# Altium PCB 8810.PcbDoc (part 1 of 2)
Units mm, origin at the board's own origin, x right, y up, seen from the top; angles counter-clockwise.
Board outline 295 x 220 mm, 2 copper layers (Top Layer, Bottom Layer); 156 components, 133 nets, 555 pads, 13 vias.
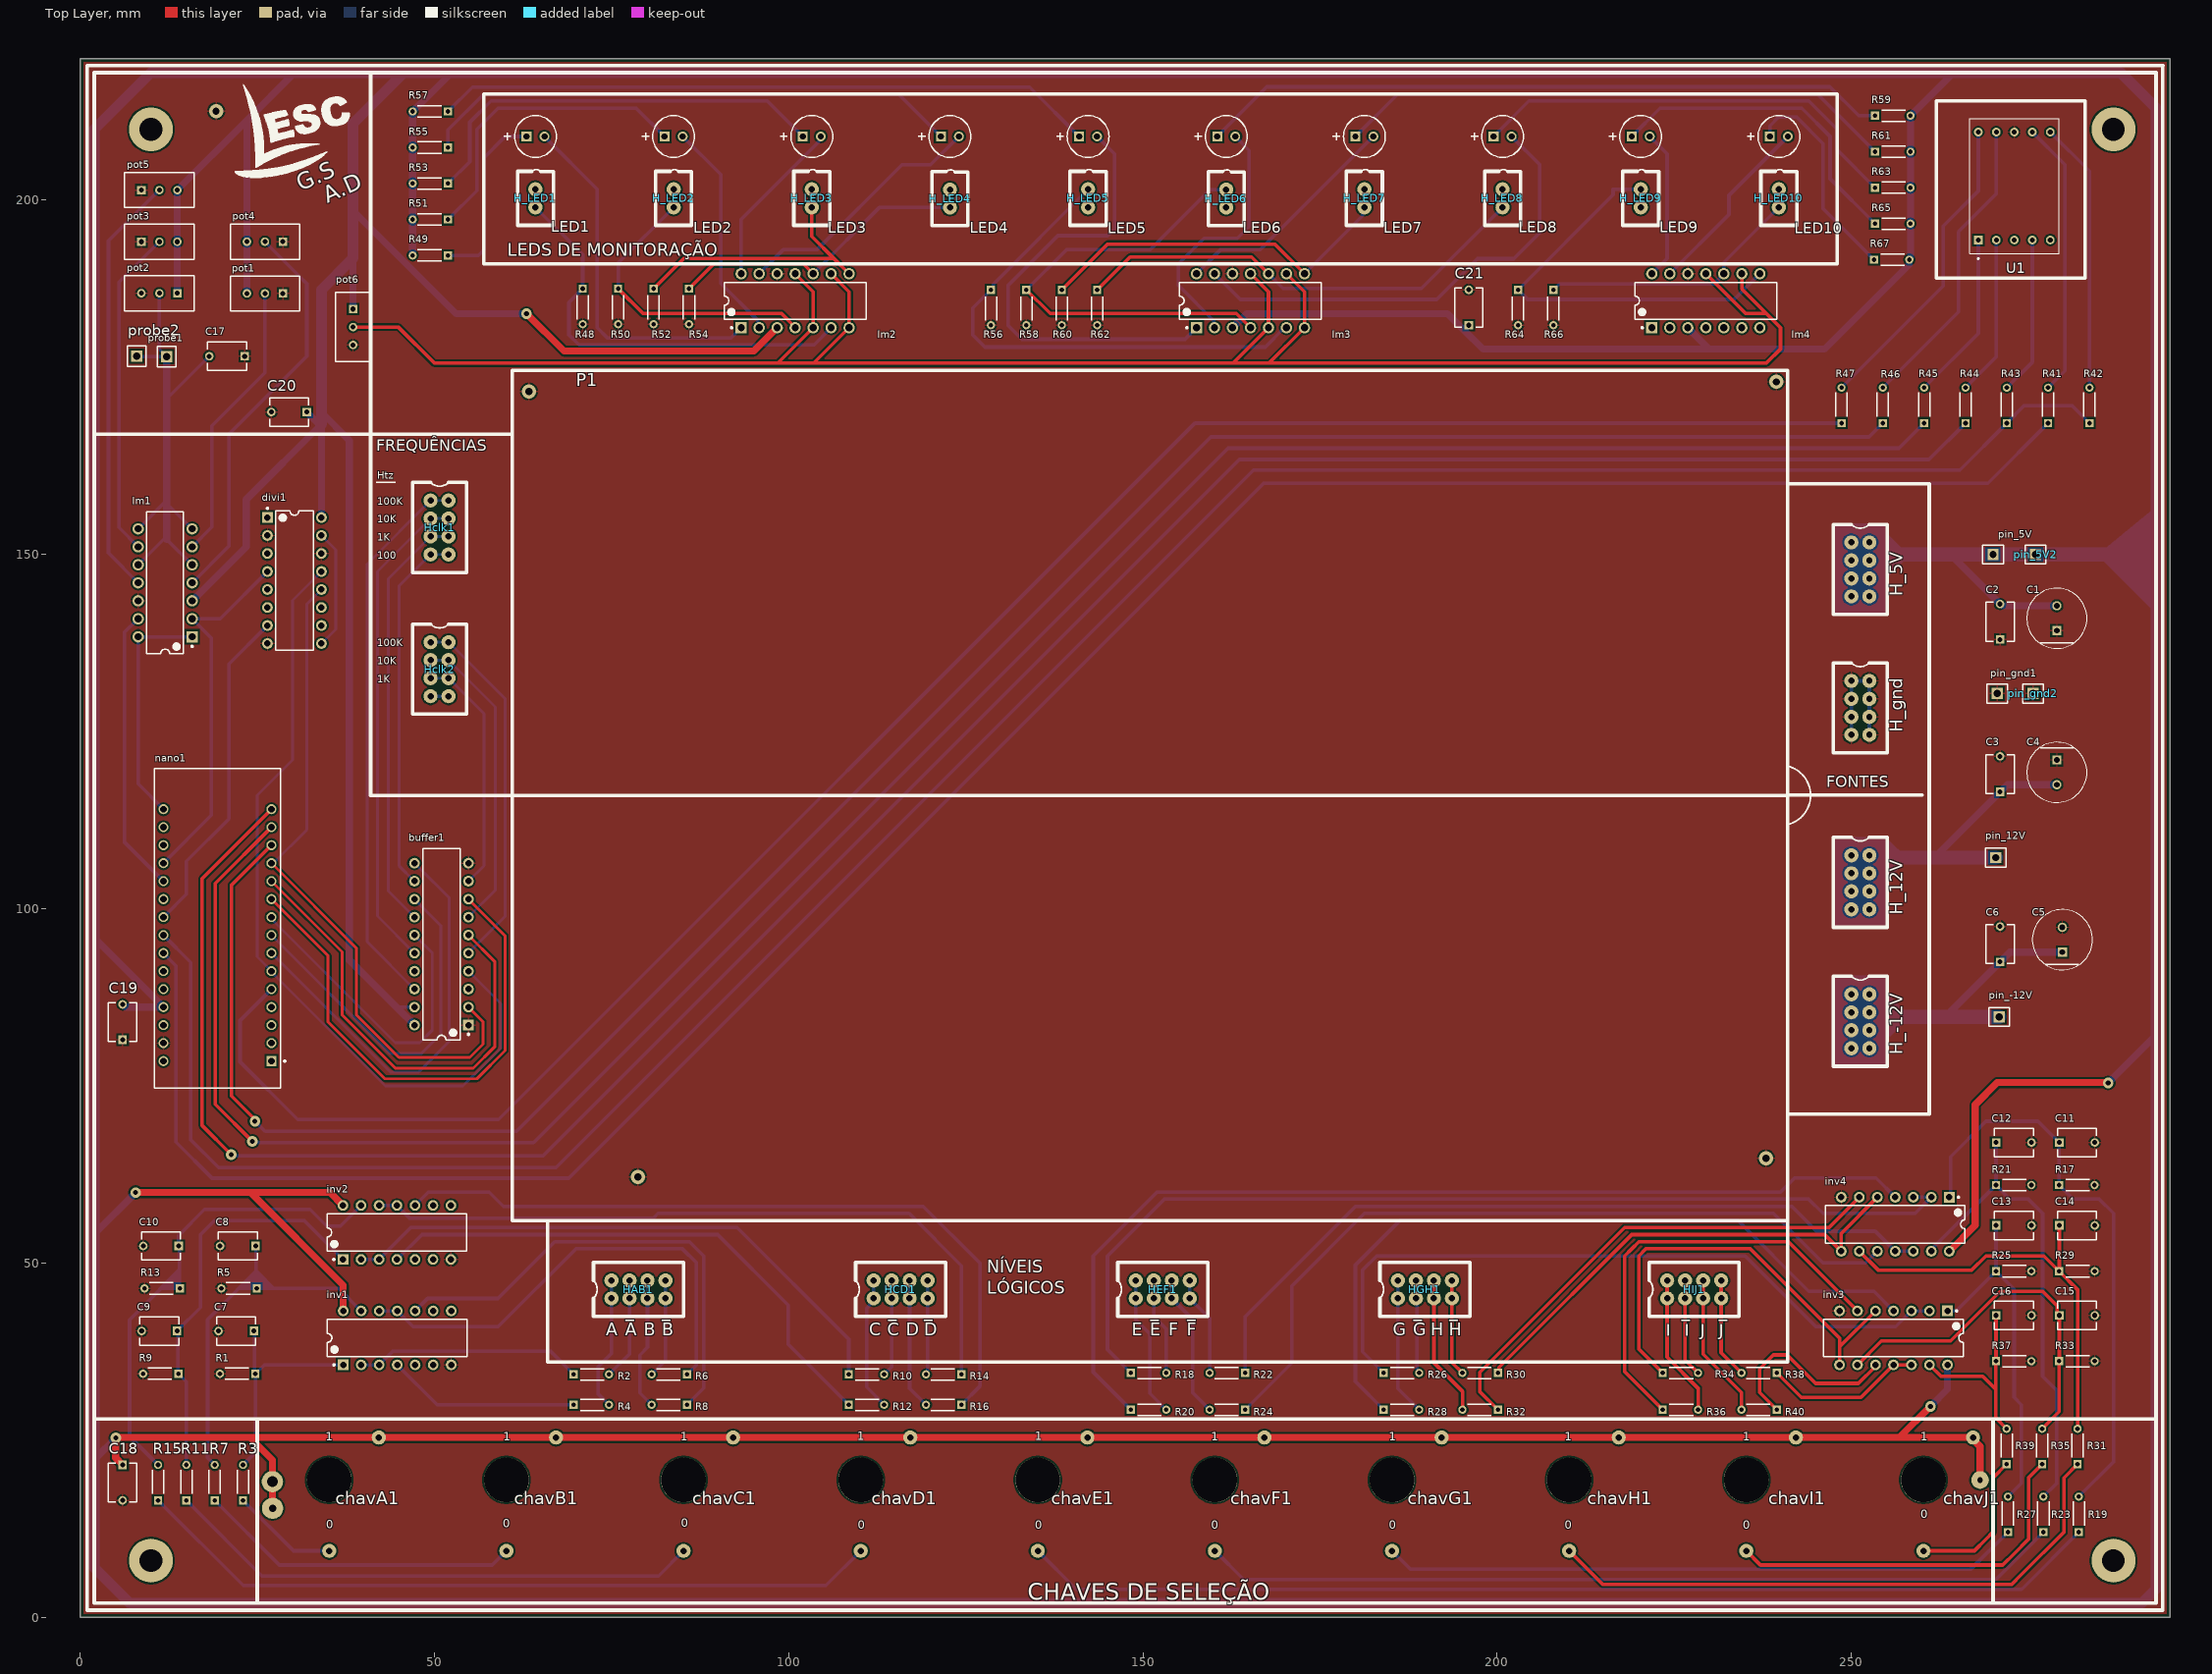
[diagram p0: Top Layer view]
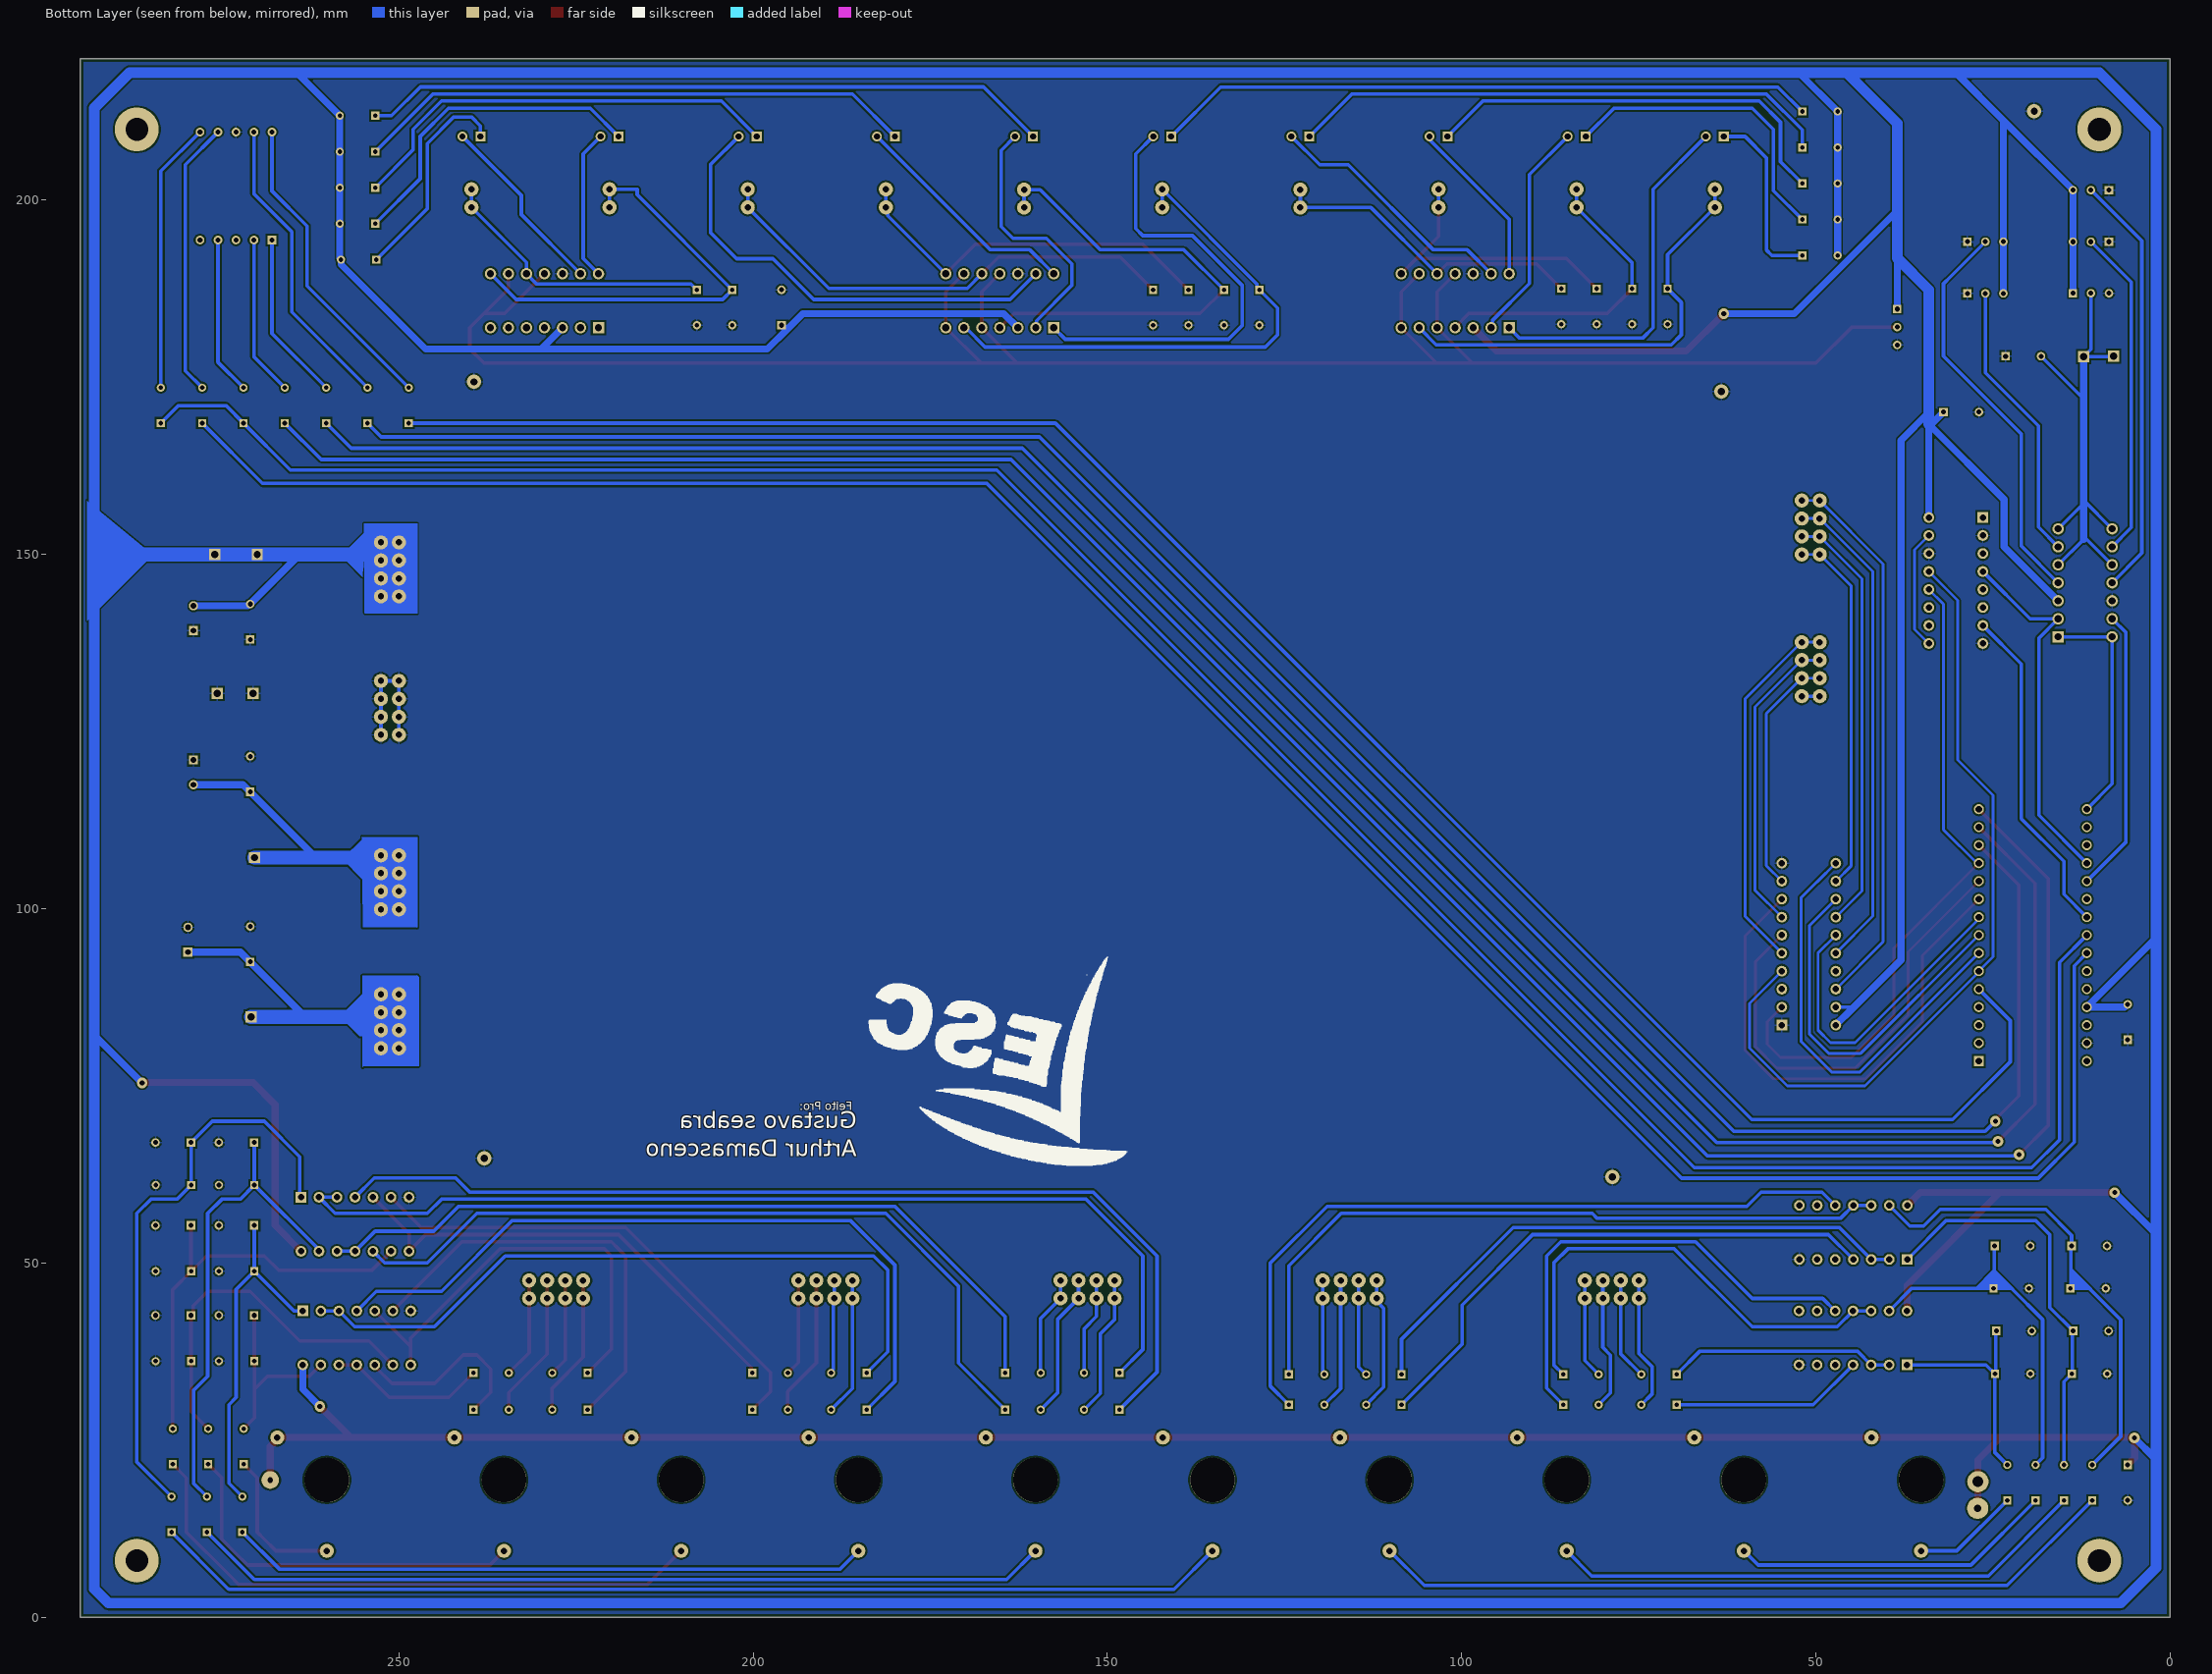
[diagram p1: Bottom Layer view, seen from below]

## Layer stack, top to bottom
Top Solder: solder mask 0.0102, Solder Resist, Dk 3.5
Top Layer: signal copper 0.0356
Dielectric 1: dielectric 0.32, FR-4, Dk 4.8
Bottom Layer: signal copper 0.0356
Bottom Solder: solder mask 0.0102, Solder Resist, Dk 3.5

## Board outline
0,0 295,0 295,220 0,220

## Design rules (kind name [scope] priority, off if disabled: settings)
BoardOutlineClearance [All] p1: gap=0.5 ignorepadtopadclearanceinfootprint=FALSE
Clearance [All] p1: gap=0.254 ignorepadtopadclearanceinfootprint=FALSE
PolygonConnect [All] p1: connectstyle=Relief reliefconductorwidth=0.254 reliefentries=4 polygonreliefangle="90 Angle" airgapwidth=0.254
RoutingVias [All] p1: holewidth=0.711 width=1.5 viastyle="Through Hole" minholewidth=0.15 minwidth=0.35 maxholewidth=6 maxwidth=8
SolderMaskExpansion [All] p1: expansion=0.102 istentingtop=FALSE
Width [All] p1: maxlimit=2 minlimit=0.2 preferedwidth=0.5
30 further rules are at their usual default settings.

## Classes and differential pairs
component class probe: C17 divi1 lm1 "PONTA DE PROVA" pot1 pot2 pot3 pot4 pot5 probe1 probe2 R41 R42 R43 R44 R45 R46 R47 U1
component class alimentacao: C1 C2 C3 C4 C5 C6 H_5V H_12V H_-12V H_-12v H_gnd pin_5V pin_5V2 pin_12V pin_-12V pin_gnd1 pin_gnd2
component class clock: buffer1 C19 C20 Hclk1 Hclk2 nano1
component class leds: C21 H_LED1 H_LED2 H_LED3 H_LED4 H_LED5 H_LED6 H_LED7 H_LED8 H_LED9 H_LED10 LED1 LED2 LED3 LED4 LED5 LED6 LED7 LED8 LED9 LED10 lm2 lm3 lm4 pot6 R48 R49 R50 R51 R52 R53 R54 R55 R56 R57 R58 R59 R60 R61 R62 R63 R64 R65 R66 R67
component class protoboard: P1
component class chaves: C7 C8 C9 C10 C11 C12 C13 C14 C15 C16 C18 chavA1 chavB1 chavC1 chavD1 chavE1 chavF1 chavG1 chavH1 chavI1 chavJ1 HAB1 HCD1 HEF1 HGH1 HIJ1 inv1 inv2 inv3 inv4 j R1 R2 R3 R4 R5 R6 R7 R8 R9 R10 R11 R12 R13 R14 R15 R16 R17 R18 R19 R20 R21 R22 R23 R24 R25 R26 R27 R28 R29 R30 R31 R32 R33 R34 R35 R36 R37 R38 R39 R40

## Components (designator, comment, footprint, x,y, rotation, side; value= is the part's Value field where it differs from the comment)
buffer1 "SN74LS241N" N0020A 51,95 r180 top locked
C1 "EEU-FM1H101BJ" FP-FM8-MFG 279,141 r90 top locked
C2 "RCER71H335K3K1H03B" FP-RCE3M1-MFG 271,140.5 r90 top locked
C3 "RCER71H335K3K1H03B" FP-RCE3M1-MFG 271,119 r90 top locked
C4 "EEU-FM1H101BJ" FP-FM8-MFG 279,119.25 r270 top locked
C5 "EEU-FM1H101BJ" FP-FM8-MFG 279.78,95.632 r90 top locked
C6 "RCER71H335K3K1H03B" FP-RCE3M1-MFG 271,95 r90 top locked
C7 "RCER71H335K3K1H03B" FP-RCE3M1-MFG 22.031,40.409 r180 top locked
C8 "RCER71H335K3K1H03B" FP-RCE3M1-MFG 22.263,52.4 r180 top locked
C9 "RCER71H335K3K1H03B" FP-RCE3M1-MFG 11.185,40.409 r180 top locked
C10 "RCER71H335K3K1H03B" FP-RCE3M1-MFG 11.417,52.4 r180 top locked
C11 "RCER71H335K3K1H03B" FP-RCE3M1-MFG 281.854,67 r0 top locked
C12 "RCER71H335K3K1H03B" FP-RCE3M1-MFG 272.934,67 r0 top locked
C13 "RCER71H335K3K1H03B" FP-RCE3M1-MFG 272.934,55.307 r0 top locked
C14 "RCER71H335K3K1H03B" FP-RCE3M1-MFG 281.854,55.307 r0 top locked
C15 "RCER71H335K3K1H03B" FP-RCE3M1-MFG 281.862,42.603 r0 top locked
C16 "RCER71H335K3K1H03B" FP-RCE3M1-MFG 272.934,42.603 r0 top locked
C17 "RCER71H335K3K1H03B" FP-RCE3M1-MFG 20.73,177.98 r180 top locked
C18 "RCER71H335K3K1H03B" FP-RCE3M1-MFG 6,19 r270 top
C19 "RCER71H335K3K1H03B" FP-RCE3M1-MFG 6,84 r90 top
C20 "RCER71H335K3K1H03B" FP-RCE3M1-MFG 29.493,170.096 r180 top
C21 "RCER71H335K3K1H03B" FP-RCE3M1-MFG 196,184.857 r90 top
chavA1 "chave MTS-102" MTS-102 35.168,19.372 r270 top
chavB1 "chave MTS-102" MTS-102 60.168,19.372 r270 top
chavC1 "chave MTS-102" MTS-102 85.168,19.372 r270 top
chavD1 "chave MTS-102" MTS-102 110.168,19.372 r270 top
chavE1 "chave MTS-102" MTS-102 135.168,19.372 r270 top
chavF1 "chave MTS-102" MTS-102 160.168,19.372 r270 top
chavG1 "chave MTS-102" MTS-102 185.168,19.372 r270 top
chavH1 "chave MTS-102" MTS-102 210.168,19.372 r270 top
chavI1 "chave MTS-102" MTS-102 235.168,19.372 r270 top
chavJ1 "chave MTS-102" MTS-102 260.168,19.372 r270 top
divi1 "CD74HC390E" N0016A 30.253,146.325 r0 top locked
H_5V "header 2x4" "header 2x4" 250,151.7 r0 top locked
H_12V "header 2x4" "header 2x4" 250,107.54 r0 top locked
H_-12V "header 2x4" "header 2x4" 250,87.92 r0 top locked
H_gnd "header 2x4" "header 2x4" 250,132.16 r0 top locked
H_LED1 "header 2x1" "header 2x1" 64.27,201.54 r0 top locked
H_LED2 "header 2x1" "header 2x1" 83.77,201.54 r0 top locked
H_LED3 "header 2x1" "header 2x1" 103.27,201.54 r0 top locked
H_LED4 "header 2x1" "header 2x1" 122.77,201.5 r0 top locked
H_LED5 "header 2x1" "header 2x1" 142.27,201.54 r0 top locked
H_LED6 "header 2x1" "header 2x1" 161.77,201.5 r0 top locked
H_LED7 "header 2x1" "header 2x1" 181.27,201.54 r0 top locked
H_LED8 "header 2x1" "header 2x1" 200.77,201.54 r0 top locked
H_LED9 "header 2x1" "header 2x1" 220.27,201.54 r0 top locked
H_LED10 "header 2x1" "header 2x1" 239.77,201.54 r0 top locked
HAB1 "header 2x4" "header 2x4" 75,45 r90 top locked
HCD1 "header 2x4" "header 2x4" 112,45 r90 top locked
Hclk1 "header 2x4" "header 2x4" 49.46,157.62 r0 top
Hclk2 "header 2x4" "header 2x4" 49.46,137.62 r0 top locked
HEF1 "header 2x4" "header 2x4" 149,45 r90 top locked
HGH1 "header 2x4" "header 2x4" 186,45 r90 top locked
HIJ1 "header 2x4" "header 2x4" 224,45 r90 top locked
inv1 "SN74HC14N" N0014A 44.752,39.43 r90 top locked
inv2 "SN74HC14N" N0014A 44.726,54.311 r90 top locked
inv3 "SN74HC14N" N0014A 255.944,39.43 r270 top locked
inv4 "SN74HC14N" N0014A 256.2,55.464 r270 top locked
LED1 "WP7113SGD" KING-WP7113SGD_V 64.27,209 r0 top locked
LED2 "WP7113SGD" KING-WP7113SGD_V 83.77,209 r0 top locked
LED3 "WP7113SGD" KING-WP7113SGD_V 103.27,209 r0 top locked
LED4 "WP7113SGD" KING-WP7113SGD_V 122.77,209 r0 top locked
LED5 "WP7113SGD" KING-WP7113SGD_V 142.27,209 r0 top locked
LED6 "WP7113SGD" KING-WP7113SGD_V 161.77,209 r0 top locked
LED7 "WP7113SGD" KING-WP7113SGD_V 181.27,209 r0 top locked
LED8 "WP7113SGD" KING-WP7113SGD_V 200.77,209 r0 top locked
LED9 "WP7113SGD" KING-WP7113SGD_V 220.27,209 r0 top locked
LED10 "WP7113SGD" KING-WP7113SGD_V 239.77,209 r0 top locked
lm1 "LM339J" J0014A 12,146 r180 top locked
lm2 "LM339J" J0014A 100.92,185.81 r90 top locked
lm3 "LM339J" J0014A 165.19,185.81 r90 top locked
lm4 "LM339J" J0014A 229.46,185.81 r90 top locked
nano1 "A000005" FP-A000005-MFG 19.385,97.223 r180 top locked
P1 "2 protoboard 830 pin" PCBComponent_1 241,56 r180 top locked
pin_5V "TSW-101-07-L-S" FP-TSW-101-07-L-S-MFG 270,150 r180 top locked
pin_5V2 "TSW-101-07-L-S" FP-TSW-101-07-L-S-MFG 276,150 r180 top locked
pin_12V "TSW-101-07-L-S" FP-TSW-101-07-L-S-MFG 270.365,107.213 r180 top locked
pin_-12V "TSW-101-07-L-S" FP-TSW-101-07-L-S-MFG 270.881,84.731 r180 top locked
pin_gnd1 "TSW-101-07-L-S" FP-TSW-101-07-L-S-MFG 270.587,130.368 r180 top locked
pin_gnd2 "TSW-101-07-L-S" FP-TSW-101-07-L-S-MFG 275.667,130.368 r180 top locked
pot1 "3296W-1-501LF" FP-3296W-MFG 26.085,186.839 r90 top locked
pot2 "3296W-1-501LF" FP-3296W-MFG 11.18,186.859 r90 top locked
pot3 "3296W-1-501LF" FP-3296W-MFG 11.18,194.143 r270 top locked
pot4 "3296W-1-501LF" FP-3296W-MFG 26.085,194.134 r90 top locked
pot5 "3296W-1-501LF" FP-3296W-MFG 11.18,201.438 r270 top locked
pot6 "3296W-1-501LF" FP-3296W-MFG 38.527,182.102 r180 top locked
probe1 "TSW-101-07-L-S" FP-TSW-101-07-L-S-MFG 12.228,177.926 r90 top locked
probe2 "TSW-101-07-L-S" FP-TSW-101-07-L-S-MFG 8,178 r90 top
R1 "MRS16000C2002FCT00" FP-MRS1600-MFG 22.234,34.362 r180 top locked
R2 "MRS16000C2002FCT00" FP-MRS1600-MFG 72.152,34.279 r0 top locked
R3 "MRS16000C2002FCT00" FP-MRS1600-MFG 23,19 r90 top
R4 "MRS16000C2002FCT00" FP-MRS1600-MFG 72.152,29.988 r0 top locked
R5 "MRS16000C2002FCT00" FP-MRS1600-MFG 22.431,46.414 r180 top locked
R6 "MRS16000C2002FCT00" FP-MRS1600-MFG 83.161,34.279 r180 top locked
R7 "MRS16000C2002FCT00" FP-MRS1600-MFG 19,19 r90 top
R8 "MRS16000C2002FCT00" FP-MRS1600-MFG 83.161,29.988 r180 top locked
R9 "MRS16000C2002FCT00" FP-MRS1600-MFG 11.388,34.362 r180 top locked
R10 "MRS16000C2002FCT00" FP-MRS1600-MFG 110.985,34.279 r0 top locked
R11 "MRS16000C2002FCT00" FP-MRS1600-MFG 15,19 r90 top
R12 "MRS16000C2002FCT00" FP-MRS1600-MFG 110.985,29.988 r0 top locked
R13 "MRS16000C2002FCT00" FP-MRS1600-MFG 11.586,46.414 r180 top locked
R14 "MRS16000C2002FCT00" FP-MRS1600-MFG 121.885,34.279 r180 top locked
R15 "MRS16000C2002FCT00" FP-MRS1600-MFG 11,19 r90 top
R16 "MRS16000C2002FCT00" FP-MRS1600-MFG 121.885,29.988 r180 top locked
R17 "MRS16000C2002FCT00" FP-MRS1600-MFG 281.829,61 r0 top locked
R18 "MRS16000C2002FCT00" FP-MRS1600-MFG 150.806,34.478 r0 top locked
R19 "MRS16000C2002FCT00" FP-MRS1600-MFG 282.104,14.518 r90 top locked
R20 "MRS16000C2002FCT00" FP-MRS1600-MFG 150.806,29.29 r0 top locked
R21 "MRS16000C2002FCT00" FP-MRS1600-MFG 272.909,61 r0 top locked
R22 "MRS16000C2002FCT00" FP-MRS1600-MFG 161.925,34.478 r180 top locked
R23 "MRS16000C2002FCT00" FP-MRS1600-MFG 277.1,14.518 r90 top locked
R24 "MRS16000C2002FCT00" FP-MRS1600-MFG 161.925,29.29 r180 top locked
R25 "MRS16000C2002FCT00" FP-MRS1600-MFG 272.909,48.841 r0 top locked
R26 "MRS16000C2002FCT00" FP-MRS1600-MFG 186.494,34.478 r0 top locked
R27 "MRS16000C2002FCT00" FP-MRS1600-MFG 272.095,14.518 r90 top locked
R28 "MRS16000C2002FCT00" FP-MRS1600-MFG 186.494,29.29 r0 top locked
R29 "MRS16000C2002FCT00" FP-MRS1600-MFG 281.837,48.841 r0 top locked
R30 "MRS16000C2002FCT00" FP-MRS1600-MFG 197.613,34.478 r180 top locked
R31 "MRS16000C2002FCT00" FP-MRS1600-MFG 281.928,24.1 r90 top locked
R32 "MRS16000C2002FCT00" FP-MRS1600-MFG 197.613,29.29 r180 top locked
R33 "MRS16000C2002FCT00" FP-MRS1600-MFG 281.837,36.138 r0 top locked
R34 "MRS16000C2002FCT00" FP-MRS1600-MFG 225.872,34.478 r0 top locked
R35 "MRS16000C2002FCT00" FP-MRS1600-MFG 276.924,24.1 r90 top locked
R36 "MRS16000C2002FCT00" FP-MRS1600-MFG 225.872,29.29 r0 top locked
R37 "MRS16000C2002FCT00" FP-MRS1600-MFG 272.909,36.138 r0 top locked
R38 "MRS16000C2002FCT00" FP-MRS1600-MFG 236.991,34.478 r180 top locked
R39 "MRS16000C2002FCT00" FP-MRS1600-MFG 271.919,24.1 r90 top locked
R40 "MRS16000C2002FCT00" FP-MRS1600-MFG 236.991,29.29 r180 top locked
R41 "MRS16000C2002FCT00" FP-MRS1600-MFG 277.774,171.038 r90 top locked
R42 "MRS16000C2002FCT00" FP-MRS1600-MFG 283.608,171.038 r90 top locked
R43 "MRS16000C2002FCT00" FP-MRS1600-MFG 271.941,171.038 r90 top locked
R44 "MRS16000C2002FCT00" FP-MRS1600-MFG 266.107,171.038 r90 top locked
R45 "MRS16000C2002FCT00" FP-MRS1600-MFG 260.274,171.038 r90 top locked
R46 "MRS16000C2002FCT00" FP-MRS1600-MFG 254.441,171.038 r90 top locked
R47 "MRS16000C2002FCT00" FP-MRS1600-MFG 248.607,171.038 r90 top locked
R48 "MRS16000C2002FCT00" FP-MRS1600-MFG 70.939,185.009 r270 top locked
R49 "MRS16000C2002FCT00" FP-MRS1600-MFG 49.438,192.206 r180 top locked
R50 "MRS16000C2002FCT00" FP-MRS1600-MFG 75.939,185.009 r270 top locked
R51 "MRS16000C2002FCT00" FP-MRS1600-MFG 49.438,197.284 r180 top locked
R52 "MRS16000C2002FCT00" FP-MRS1600-MFG 80.939,185.009 r270 top locked
R53 "MRS16000C2002FCT00" FP-MRS1600-MFG 49.438,202.362 r180 top locked
R54 "MRS16000C2002FCT00" FP-MRS1600-MFG 85.939,185.009 r270 top locked
R55 "MRS16000C2002FCT00" FP-MRS1600-MFG 49.438,207.44 r180 top locked
R56 "MRS16000C2002FCT00" FP-MRS1600-MFG 128.559,184.857 r270 top locked
R57 "MRS16000C2002FCT00" FP-MRS1600-MFG 49.438,212.518 r180 top locked
R58 "MRS16000C2002FCT00" FP-MRS1600-MFG 133.559,184.857 r270 top locked
R59 "MRS16000C2002FCT00" FP-MRS1600-MFG 255.847,211.927 r0 top locked
R60 "MRS16000C2002FCT00" FP-MRS1600-MFG 138.559,184.857 r270 top locked
R61 "MRS16000C2002FCT00" FP-MRS1600-MFG 255.847,206.849 r0 top locked
R62 "MRS16000C2002FCT00" FP-MRS1600-MFG 143.559,184.857 r270 top locked
R63 "MRS16000C2002FCT00" FP-MRS1600-MFG 255.847,201.771 r0 top locked
R64 "MRS16000C2002FCT00" FP-MRS1600-MFG 202.949,184.857 r270 top
R65 "MRS16000C2002FCT00" FP-MRS1600-MFG 255.847,196.693 r0 top locked
R66 "MRS16000C2002FCT00" FP-MRS1600-MFG 207.949,184.857 r270 top locked
R67 "MRS16000C2002FCT00" FP-MRS1600-MFG 255.686,191.615 r0 top locked
U1 "LDSC512RI" LED_LDSC512RI 273,202 r90 top locked

## Footprints (in the part's own frame and the unit in brackets; to place one, negate y for a bottom-side part, rotate by r counter-clockwise, add the part's x,y. Pads: shape width x height; smd on the part's side, far side on the other; paste and mask are expansions set on the pad)
FP-3296W-MFG [mm]
  rect 1.2x1.2 hole 0.7 paste-2539.97 mask+0: 1(0.005,-2.54)
  round 1.2 hole 0.7 paste-2539.97 mask+0: 2(0.005,0) 3(0.005,2.54)
  silkscreen extent -2.48,-4.89 2.48,4.89, body extent -2.58,-4.99 2.58,4.99, height 0.25
FP-A000005-MFG [mil]
  rect 55.67x55.67 hole 35.98 paste-99999 mask+0: 1(-300,737.5)
  round 55.67 hole 35.98 paste-99999 mask+0: 2(-300,637.5) 3(-300,537.5) 4(-300,437.5) 5(-300,337.5) 6(-300,237.5) 7(-300,137.5) 8(-300,37.5) 9(-300,-62.5) 10(-300,-162.5) 11(-300,-262.5) 12(-300,-362.5) 13(-300,-462.5) 14(-300,-562.5) 15(-300,-662.5) 16(300,-662.5) 17(300,-562.5) 18(300,-462.5) 19(300,-362.5) 20(300,-262.5) 21(300,-162.5) 22(300,-62.5) 23(300,37.5) 24(300,137.5) 25(300,237.5) 26(300,337.5) 27(300,437.5) 28(300,537.5) 29(300,637.5) 30(300,737.5)
  silkscreen extent -379,-888 350,887, body extent -354,-891 354,891, height 10
FP-FM8-MFG [mm]
  rect 1.3x1.3 hole 0.8 paste-2539.97 mask+0: 1(-1.75,0)
  round 1.3 hole 0.8 paste-2539.97 mask+0: 2(1.75,0)
  silkscreen extent -4.25,-4.25 4.25,4.25, body extent -4.35,-4.35 4.35,4.35, height 0.25
FP-MRS1600-MFG [mm]
  rect 1.15x1.15 hole 0.65 paste-2539.97 mask+0: 1(-2.5,0)
  round 1.15 hole 0.65 paste-2539.97 mask+0: 2(2.5,0)
  silkscreen extent -1.55,-0.8 1.8,0.8, body extent -3.17,-0.9 3.17,0.9, height 0.25
FP-RCE3M1-MFG [mm]
  rect 1.2x1.2 hole 0.7 paste-2539.97 mask+0: 1(-2.5,0)
  round 1.2 hole 0.7 paste-2539.97 mask+0: 2(2.5,0)
  silkscreen extent -2.75,-2 2.75,2, body extent -3.2,-2.1 3.2,2.1, height 0.25
FP-TSW-101-07-L-S-MFG [mm]
  rect 1.57x1.57 hole 1.02 paste-2539.97 mask+0: 1(0,0)
  silkscreen extent -1.46,-1.34 1.46,1.34, body extent -1.56,-1.44 1.56,1.44, height 0.25
"header 2x1" [mm] "header male 2x1"
  round 2 hole 0.9: C1(0,0) C2(0,-2.54)
  silkscreen extent -2.54,-5.08 2.54,2.78, body extent -1.25,-3.75 1.25,1.33, height 8.4
"header 2x4" [mm] "header female 2x4"
  round 2 hole 0.9: C1(0,0) C2(2.54,0) C3(0,-2.54) C4(2.54,-2.54) C5(0,-5.08) C6(2.54,-5.08) C7(0,-7.62) C8(2.54,-7.62)
  silkscreen extent -2.54,-10.16 5.08,2.54, body extent -1.27,-8.89 3.81,1.27, height 4.5
J0014A [mm] "DIP, 14-Leads, Body 19.95x7.2mm, Pitch 2.54mm"
  rect 1.6x1.6 hole 1: 1(-3.81,7.62)
  round 1.6 hole 1: 2(-3.81,5.08) 3(-3.81,2.54) 4(-3.81,0) 5(-3.81,-2.54) 6(-3.81,-5.08) 7(-3.81,-7.62) 8(3.81,-7.62) 9(3.81,-5.08) 10(3.81,-2.54) 11(3.81,0) 12(3.81,2.54) 13(3.81,5.08) 14(3.81,7.62)
  silkscreen extent -3.94,-10 2.6,10, body extent -3.96,-9.97 3.96,9.97, height 5.08
KING-WP7113SGD_V [mm] "THD, 2-Leads, Dia 5.9mm, Body Length 8.6mm"
  rect 1.4x1.4 hole 0.889: 1(-1.27,0)
  round 1.4 hole 0.889: 2(1.27,0)
  silkscreen extent -4.47,-2.95 2.95,2.95, body extent -2.95,-2.95 2.5,2.95, height 15.5
LED_LDSC512RI [mm]
  rect 1.218x1.218 / inner round 1.218 / far side rect 1.218x1.218 hole 0.71: 1(-7.62,5.08)
  round 1.218 hole 0.71: 2(-7.62,2.54) 3(-7.62,0) 4(-7.62,-2.54) 5(-7.62,-5.08) 6(7.62,-5.08) 7(7.62,-2.54) 8(7.62,0) 9(7.62,2.54) 10(7.62,5.08)
  silkscreen extent -10.35,-6.3 9.5,6.3, body extent -9.37,-6.17 9.63,6.43, height 8
MTS-102 [mm] "chave MTS-102,"
  round 6.3 hole 6.3 unplated: C1(0,0)
  round 2 hole 0.9: C2(10,0) C3(-6,7)
  body extent -6.6,-3.95 6.6,3.95, height 18.34
N0014A [mm] "DIP, 14-Leads, Body 19.7x6.6mm, Pitch 2.54mm"
  rect 1.5x1.5 hole 0.9: 1(-3.81,7.62)
  round 1.5 hole 0.9: 2(-3.81,5.08) 3(-3.81,2.54) 4(-3.81,0) 5(-3.81,-2.54) 6(-3.81,-5.08) 7(-3.81,-7.62) 8(3.81,-7.62) 9(3.81,-5.08) 10(3.81,-2.54) 11(3.81,0) 12(3.81,2.54) 13(3.81,5.08) 14(3.81,7.62)
  silkscreen extent -3.93,-9.85 2.65,9.85, body extent -3.95,-9.85 3.95,9.85, height 5.08
N0016A [mm] "DIP, 16-Leads, Body 19.7x6.6mm, Pitch 2.54mm"
  rect 1.5x1.5 hole 0.9: 1(-3.81,8.89)
  round 1.5 hole 0.9: 2(-3.81,6.35) 3(-3.81,3.81) 4(-3.81,1.27) 5(-3.81,-1.27) 6(-3.81,-3.81) 7(-3.81,-6.35) 8(-3.81,-8.89) 9(3.81,-8.89) 10(3.81,-6.35) 11(3.81,-3.81) 12(3.81,-1.27) 13(3.81,1.27) 14(3.81,3.81) 15(3.81,6.35) 16(3.81,8.89)
  silkscreen extent -3.93,-9.85 2.65,10.31, body extent -3.95,-9.85 3.95,9.85, height 5.08
N0020A [mm] "DIP, 20-Leads, Body 26.9x6.6mm, Pitch 2.54mm"
  rect 1.5x1.5 hole 0.9: 1(-3.81,11.43)
  round 1.5 hole 0.9: 2(-3.81,8.89) 3(-3.81,6.35) 4(-3.81,3.81) 5(-3.81,1.27) 6(-3.81,-1.27) 7(-3.81,-3.81) 8(-3.81,-6.35) 9(-3.81,-8.89) 10(-3.81,-11.43) 11(3.81,-11.43) 12(3.81,-8.89) 13(3.81,-6.35) 14(3.81,-3.81) 15(3.81,-1.27) 16(3.81,1.27) 17(3.81,3.81) 18(3.81,6.35) 19(3.81,8.89) 20(3.81,11.43)
  silkscreen extent -3.94,-13.5 2.65,13.5, body extent -3.95,-13.45 3.95,13.45, height 5.08
PCBComponent_1 [mm] "2 protoboad 830 pin each"
  silkscreen extent -3.24,-120 180,0, body extent 7,-114.75 172,-4.5, height 10

## Part data
buffer1: library part CMP-0440-00144-3, "Octal Buffers And Line Drivers With 3-State Outputs, N0020A, TUBE", F @ Nom Voltage(Max)(Mhz)=35, Generic Part Number=SN74LS241, ICC @ Nom Voltage(Max)(mA)=0.046, Manufacturer="Texas Instruments", Operating Temperature Range(C)="0 to 70", Rating=Catalog, tpd @ Nom Voltage(Max)(ns)=18, Voltage(Nom)(V)=5, Bits(#)=8, Code_JEDEC=MS-001, DatasheetVersion=SDLS144C, Input Type=TTL, Output Type=TTL, PackageReference=N0020A, PackageVersion=http://www.ti.com/lit/ml/mpdi002c/mpdi002c.pdf, VCC(Max)(V)=5.25, VCC(Min)(V)=4.75
C1 C4 C5: library part CMP-05427-000021-1, "CAP ALUM 100UF 20% 50V RADIAL", Capacitance=100uF, Case/Package=Radial, ESR (Equivalent Series Resistance)=61mR, Max Operating Temperature=105°C, Min Operating Temperature=-40°C, Package Quantity=1000, Ripple Current=870mA, Tolerance=20%, Voltage Rating=50V, Diameter=8mm, Dissipation Factor=0.1%, Features="General Purpose", Height=11.5mm, Height - Seated (Max)=0.512inch, Impedance=61mR, Lead Free="Lead Free", Lead Pitch=0.197inch, Length=11.5mm, Life (Hours)=3000Hour, Mount="Through Hole", Packaging="Ammo Pack", Polarity=Polar, Radiation Hardening=No, Series=FM, Termination=Radial, Voltage Rating (DC)=50V
C2 C3 C6 C7 C8 C9 C10 C11 C12 C13 C14 C15 C16 C17 C18 C19 C20 C21: library part CMP-06035-028451-1, "Cap Ceramic 3.3uF 50V X7R ±10% Radial 5mm +125°C Automotive Ammo Pack", Capacitance=3.3uF, Case/Package=Radial, Dielectric=X7R, Max Operating Temperature=125°C, Min Operating Temperature=-55°C, Package Quantity=500, Ratings=AEC-Q200, Resistor Type=Ceramic, Tolerance=10%, Voltage Rating=50V, Height=5mm, Height - Seated (Max)=0.197inch, Lead Diameter=0.5mm, Lead Pitch=0.197inch, Lead/Base Style="Formed Leads", Length=0.217inch, Mount="Through Hole", Packaging=Bulk, Termination=Radial, Voltage Rating (DC)=50V, Width=0.157inch
chavA1 chavB1 chavC1 chavD1 chavE1 chavF1 chavG1 chavH1 chavI1 chavJ1: library part MTS-102, "chave caso seja usadsada sendo encaixada", Parameter 1=MTS-102
divi1: library part CMP-1623-00557-2, "High Speed CMOS Logic Dual Decade Ripple Counters, N0016A, TUBE", F @ Nom Voltage(Max)(Mhz)=28, Generic Part Number=CD74HC390, ICC @ Nom Voltage(Max)(mA)=0.08, Manufacturer="Texas Instruments", Operating Temperature Range(C)="-55 to 125", Rating=Catalog, tpd @ Nom Voltage(Max)(ns)=52, Voltage(Nom)(V)=3.3,5, Bits(#)=4, Code_JEDEC=MS-001, DatasheetVersion=SCHS185C, Function=Counter, Input Type=LVTTL/CMOS, Inputs=1, Output Drive (IOL/IOH)(Max)(mA)=5.2/-5.2, Output Type=CMOS, PackageReference=N0016A, Schmitt Trigger=No, Technology Family=HC, Type=Decade, VCC(Max)(V)=6, VCC(Min)(V)=2
H_5V H_12V H_-12V H_gnd HAB1 HCD1 Hclk1 Hclk2 HEF1 HGH1 HIJ1: "header male 2x4", Parameter 1="header 2x4"
H_LED1 H_LED2 H_LED3 H_LED4 H_LED5 H_LED6 H_LED7 H_LED8 H_LED9 H_LED10: library part "Heade 1x2", "header male 2 pin", Parameter 1=H2x1
inv1 inv2 inv3 inv4: library part CMP-1615-00889-3, "Hex Schmitt-Trigger Inverters, N0014A, TUBE", F @ Nom Voltage(Max)(Mhz)=20, Generic Part Number=SN74HC14, ICC @ Nom Voltage(Max)(mA)=0.02, Manufacturer="Texas Instruments", Operating Temperature Range(C)="-40 to 85", Rating=Catalog, tpd @ Nom Voltage(Max)(ns)=31, Voltage(Nom)(V)=5, Bits(#)=6, Code_JEDEC=MS-001, DatasheetVersion=SCLS085G, Input Type=CMOS, Output Drive (IOL/IOH)(Max)(mA)=-4/4, Output Type=CMOS, PackageReference=N0014A, Schmitt Trigger=Yes, Technology Family=HC, VCC(Max)(V)=6, VCC(Min)(V)=2
LED1 LED2 LED3 LED4 LED5 LED6 LED7 LED8 LED9 LED10: library part CMP-2100-03698-1, "LED Green, 62.5 mW, 25 mA, -40 to 85 degC, 2-Pin THD, RoHS, Bulk", Case/Package=Radial, Colour=Green, Forward Voltage=2.2V, Manufacturer=Kingbright, Package Description="2-Pin Through Hole Device, Dia 5.9 mm, Body Length 8.6 mm", Package Quantity=1000, Test Current=20mA, Datasheet URL=http://www.kingbrightusa.com/images/catalog/SPEC/WP7113SGD.pdf, Datasheet Version="Rev. 6B, 01/2015", Dominant Wavelength=568nm, Height=8.6mm, Illumination Colour=Green, Lead Free=LeadFree, Lens Style=Tinted, Luminous Intensity=40mcd, Package Reference=WP7113SGD, Packaging=Bulk, RoHSCompliant=true, Viewing Angle=30degrees, Wavelength=568nm
lm1 lm2 lm3 lm4: library part CMP-0060-00012-3, "Low Power Low Offset Voltage Quad Comparator, 14-pin CerDIP", Manufacturer="Texas Instruments", PackageTopMarking=NSUZXYYTT*LM339J, PowerWise=N, ComponentLink1Description="Datasheet URL", ComponentLink1URL=http://www.ti.com/general/docs/lit/getliterature.tsp?genericPartNumber=LM339-N&fileType=pdf, CompType=Comparator, PackageDescription="Cerdip, .400 x .310in Body, 14 Lead, .300in Centers, .100in Pitch", PackageReference=J0014A, PinCount=14, RoHS=N
nano1: library part CMP-189986-000002-1, "ARDUINO NANO ATMEGA328 EVAL BRD", Operating Supply Voltage=12V, Package Quantity=50, Core Architecture=AVR, Data Bus Width=8b, Evaluation Kit=Yes, Height=0.25inch, Interface=I2C, Length=7inch, Number of Bits=8, Packaging=Bulk, REACH SVHC="No SVHC", Series="AVR® ATmega", Weight=0.358383oz, Width=5inch
P1: library part protoboard, "2 protoboard 830 pin  each", Parameter 1="2X830 pin"
pin_5V pin_5V2 pin_12V pin_-12V pin_gnd1 pin_gnd2 probe1 probe2: library part CMP-02766-001775-1, "CONN HEADER VERT 1POS", Color=Black, Flammability Rating="UL94 V-0", Max Current Rating=7.6A, Max Operating Temperature=125°C, Max Voltage Rating (AC)=550V, Min Operating Temperature=-55°C, Connector Type=Header, Contact Finish - Mating=GOLD, Contact Material=Bronze, Contact Mating Length=0.23inch, Contact Plating=Gold, Contact Shape=Square, Contact Type="Male Pin", Depth=2.54mm, Fastening Type=Pull, Gender=Male, Housing Color=Black, Housing Material=Polyester, Insulation Color=Black, Insulation Material=PBT, Lead Free="Lead Free", Length=2.54mm, Mount="Through Hole", Number of Contacts=1, Number of Positions=1, Number of Rows=1, Orientation=Straight, Packaging=Bulk, Radiation Hardening=No, Reach SVHC Compliant=Yes, RoHS Compliant=Yes, Series=TSW, Termination=Solder, Width=2.54mm
pot1 pot2 pot3 pot4 pot5 pot6: library part CMP-07234-000046-1, "TRIMMER 500 OHM 0.5W PC PIN TOP", Color=Blue, Max Operating Temperature=125°C, Max Power Dissipation=500mW, Min Operating Temperature=-55°C, Package Quantity=50, Resistance=500R, Resistance Tolerance=10%, Resistor Type=Cermet, Temperature Coefficient=100ppm/°C, Contact Plating=Tin, Depth=4.83mm, Height=0.395inch, Lead Free="Lead Free", Length=9.53mm, Military Standard=Not, Mount="Through Hole", Number of Turns=25, Packaging=Rail/Tube, Power Rating=500mW, Radiation Hardening=No, REACH SVHC="No SVHC", RoHS Compliant=Yes, Series=3296, Taper=Linear, Technology=CERMET, Termination=Pin, Tolerance=10%, Weight=0.03oz, Width=9.53mm
R1 R2 R3 R4 R5 R6 R7 R8 R9 R10 R11 R12 R13 R14 R15 R16 R17 R18 R19 R20 R21 R22 R23 R24 R25 R26 R27 R28 R29 R30 R31 R32 R33 R34 R35 R36 R37 R38 R39 R40 R41 R42 R43 R44 R45 R46 R47 R48 R49 R50 R51 R52 R53 R54 R55 R56 R57 R58 R59 R60 R61 R62 R63 R64 R65 R66 R67: library part CMP-02408-000019-1, "RES 20K OHM 0.4W 1% AXIAL", Case/Package=Conformal, Max Operating Temperature=155°C, Max Power Dissipation=400mW, Min Operating Temperature=-55°C, Resistance=20kR, Resistor Type="Metal Film", Temperature Coefficient=50ppm/°C, Tolerance=1%, Construction=Cylindrical, Contact Plating=Tin, Diameter=1.6mm, Length=3.6mm, Military Standard=Not, Mount="Through Hole", Number of Terminations=2, Packaging="Tape and Reel", Power Rating=400mW, Radiation Hardening=No, RoHS Compliant=Yes, Series=MRS16, Technology="THIN FILM", Termination=Axial
U1: ".56IN. 7 SEGMENT SINGLE DISPLAY, 565NM GREEN, GRAY FACE, WHITE SEGMENTS, COMMON", Package=None, Check_prices=https://www.snapeda.com/parts/LDS-C512RI/Lumex/view-part/?ref=eda, MF=Lumex, MP=LDS-C512RI, SnapEDA_Link=https://www.snapeda.com/parts/LDS-C512RI/Lumex/view-part/?ref=snap

## Free pads (board coordinates)
  round 6.2 hole 3.2 unplated: C11(10,210) C12(287,210) C13(287,8) C14(10,8)
  round 3 hole 1.5: C14(27.138,19.134)
  round 3 hole 1: C15(27.168,15.372)
  round 2.5 hole 0.8: C16(268.168,19.372)

## Via types
v1: diameter 1.5, hole 0.711, Top Layer to Bottom Layer, 8 vias
v2: diameter 2, hole 1, Top Layer to Bottom Layer, 5 vias

## Nets (pads, with @x,y where several pads share a name; then routed paths per layer and width w, separated by ;. In a path a pad name is that pad's centre, name@x,y a point inside that pad or via, vN(x,y) a via of type N, cw(c..) or ccw(c..) an arc to the next point about the centre after c; other vN are vias at no path point)
0.1HtzA: buffer1.11 nano1.7 | length 61.1
  Bottom Layer w0.4: nano1.7 43.805,76.931 47.757,76.931 52.095,81.268 52.095,101.561 49.865,103.791 49.829,103.791 buffer1.11
0.1HtzB: buffer1.9 Hclk2.C5 Hclk2.C6 | length 34.2
  Bottom Layer w0.4: Hclk2.C5 Hclk2.C6 57,127.54 57,106.08 buffer1.9
1HtzA: buffer1.13 nano1.8 | length 52.5
  Bottom Layer w0.4: nano1.8 43.683,79.592 48.204,79.592 50.923,82.312 50.923,97.617 buffer1.13
1HtzB: buffer1.7 Hclk2.C3 Hclk2.C4 | length 43.1
  Bottom Layer w0.4: Hclk2.C3 Hclk2.C4 58.608,128.472 58.608,102.608 buffer1.7
1KHtzA: buffer1.6 nano1.11 | length 66.2
  Top Layer w0.4: nano1.11 37,93.895 37,85 44.511,77.489 55.489,77.489 58.51,80.51 58.51,92.57 buffer1.6
1KHtzB: buffer1.14 Hclk1.C5 Hclk1.C6 | length 60.3
  Bottom Layer w0.4: buffer1.14 43.48,102.52 43.48,146.56 Hclk1.C5 Hclk1.C6
5V: buffer1.19 buffer1.20 C1.2 C2.2 C18.1 C19.2 C20.1 C21.1 chavA1.C3 chavB1.C3 chavC1.C3 chavD1.C3 chavE1.C3 chavF1.C3 chavG1.C3 chavH1.C3 chavI1.C3 chavJ1.C3 divi1.16 H_5V.C1 H_5V.C2 H_5V.C3 H_5V.C4 H_5V.C5 H_5V.C6 H_5V.C7 H_5V.C8 inv1.14 inv2.14 inv3.14 inv4.14 lm1.3 lm2.3 lm3.3 lm4.3 nano1.27 pad.C14@27.138,19.134 pad.C15 pad.C16 pin_5V2.1 pin_5V.1 pot1.3 pot2.1 pot3.3 pot4.3 pot5.3 pot6.1 R49.2 R51.2 R53.2 R55.2 R57.2 R59.2 R61.2 R63.2 R65.2 R67.2 | length 1999.7
  Top Layer w1: C18.1 5,22.5 5,25.256 v1(5.044,25.301) 5.116,25.372 23.96,25.372 ; v1(7.839,59.936) 7.85,59.947 24.059,59.947 ; pad.C15 27.153,15.387 27.153,19.119 27.138,19.134 27.138,22.193 23.96,25.372 ; inv2.14 35.279,59.947 24.059,59.947 ; inv1.14 37.132,46.874 24.059,59.947 ; v1(63,184) 68.29,178.71 95.09,178.71 lm2.3 ; v1(261.165,29.762) 256.774,25.372 ; inv4.14 267.48,55.314 267.48,72.341 270.602,75.462 286.206,75.462 v1(286.254,75.414) ; pad.C16 268.168,24.101 267.168,25.101 chavJ1.C3 256.774,25.372 ; 23.96,25.372 chavA1.C3 chavB1.C3 chavC1.C3 chavD1.C3 chavE1.C3 chavF1.C3 chavG1.C3 chavH1.C3 chavI1.C3 256.774,25.372
  Bottom Layer w0.5: 44.916,86.11 buffer1.19 ; 248.6,145.754 250,144.354 H_5V.C7 H_5V.C8 H_5V.C6 H_5V.C5 H_5V.C3 H_5V.C4 ; H_5V.C1 H_5V.C2 H_5V.C4@252.54,150
  Bottom Layer w1: 2,53.5 2,54.098 v1(7.839,59.936) ; 2,95.875 nano1.27 6.444,86.11 6.054,86.5 C19.2 ; 2.176,22.433 v1(5.044,25.301) ; pot2.1 pot3.3 pot5.3 23.545,211.257 ; lm1.3 23.438,151.088 23.438,157.758 34.063,168.383 ; pot1.3 23.545,194.138 23.545,211.257 ; 30.178,218 30.178,217.891 23.545,211.257 ; C20.1 33.707,168.383 34.063,168.383 ; divi1.16 34.063,168.383 ; 34.063,170.053 38,166.116 38,92.76 44.783,85.977 buffer1.20 ; pot6.1 38.522,191.811 ; 38.522,198.543 53.064,184 v1(63,184) ; R49.2 R51.2 R53.2 R55.2 R57.2 52.42,218 52.893,218 ; lm3.3 164.65,184 193,184 195.152,181.848 ; C21.1 195.491,181.848 195.152,181.848 ; lm4.3 229.92,179 ; v1(261.165,29.762) 263.564,32.162 inv3.14 ; 263.927,150 264,150 C2.2 271.054,143 271.304,142.75 C1.2 ; 264.42,218 R59.2 R61.2 R63.2 R65.2 258.347,191.816 258.186,191.656 R67.2 258.157,191.586 258.157,190.916 246.241,179 242.787,179 229.92,179 ; v1(286.254,75.414) 293,82.161 293,83.956 ; 195.152,181.848 198,179 229.92,179
  Bottom Layer w1.5: 34.063,168.383 34.063,170.053 34.063,187.353 38.522,191.811 38.522,198.543 38.522,210.845 45.677,218 ; 292.949,155.855 293,155.907 293,213 288,218 264.42,218 52.893,218 45.677,218 ; 293,144 293,83.956 293,82.161 293,4 291,2 7,2 2,7 2,53.5 2,95.875 2,210 10,218 30.178,218 45.677,218
  Bottom Layer w2: H_5V.C4 253.38,150 263.927,150 pin_5V.1 pin_5V2.1 285.692,150
10HtzA: buffer1.15 nano1.9 | length 45.4
  Bottom Layer w0.3: nano1.9@27.005,98.571 nano1.9
  Bottom Layer w0.4: nano1.9@27.005,98.571 44.488,81.088 47.945,81.088 49.702,82.846 49.702,93.758 buffer1.15
10HtzB: buffer1.5 Hclk2.C1 Hclk2.C2 | length 51.9
  Bottom Layer w0.4: Hclk2.C1 Hclk2.C2 59.966,129.654 59.966,98.886 buffer1.5
10KHtzA: buffer1.4 divi1.13 nano1.6 | length 115.1
  Bottom Layer w0.3: nano1.6@27.005,91.06 nano1.6
  Bottom Layer w0.4: nano1.6@27.005,91.06 43.065,75 54.046,75 59.368,80.322 59.368,86.632 buffer1.4 ; nano1.6 25,93.195 25,116 30,121 30,143.532 divi1.13
10KHtzB: buffer1.16 Hclk1.C3 Hclk1.C4 | length 69.2
  Bottom Layer w0.4: buffer1.16 41.971,98.949 41.971,147.591 Hclk1.C3 Hclk1.C4
12V: C3.1 C4.2 H_12V.C1 H_12V.C2 H_12V.C3 H_12V.C4 H_12V.C5 H_12V.C6 H_12V.C7 H_12V.C8 pin_12V.1 | length 40.4
  Bottom Layer w1: 260.786,107.213 261.713,107.213 C3.1 272,117.5 C4.2
  Bottom Layer w2: H_12V.C2 252.867,107.213 260.786,107.213 pin_12V.1
100HtzA: buffer1.8 nano1.10 | length 74.1
  Top Layer w0.4: nano1.10 35,93.355 35,84 43,76 56,76 60,80 60,96.16 buffer1.8
100HtzB: buffer1.12 Hclk1.C7 Hclk1.C8 | length 51.4
  Bottom Layer w0.4: buffer1.12 45,106.08 45,145.54 Hclk1.C7 Hclk1.C8
100KHtzA: buffer1.2 divi1.12 nano1.12 | length 95.3
  Top Layer w0.4: nano1.12 39,94.435 39,85 45,79 55,79 56.876,80.876 56.876,84.044 buffer1.2
  Bottom Layer w0.3: nano1.12 nano1.12@27.294,106.43
  Bottom Layer w0.4: nano1.12@27.294,106.43 32,111.136 32,142.992 divi1.12
100KHtzB: buffer1.18 Hclk1.C1 Hclk1.C2 | length 78
  Bottom Layer w0.4: buffer1.18 40.501,95.339 40.501,148.661 Hclk1.C1 Hclk1.C2
-12V: C5.1 C6.1 H_-12V.C1 H_-12V.C2 H_-12V.C3 H_-12V.C4 H_-12V.C5 H_-12V.C6 H_-12V.C7 H_-12V.C8 pin_-12V.1 | length 39.7
  Bottom Layer w1: 262.439,84.731 263.231,84.731 C6.1 272.382,93.882 C5.1
  Bottom Layer w2: H_-12V.C4 253.189,84.731 262.439,84.731 pin_-12V.1
chaveA: inv1.4 R4.1 | length 27.2
  Bottom Layer w0.5: inv1.4 50.384,29.988 R4.1
chaveA/: inv1.2 inv1.3 R2.1 | length 32.2
  Bottom Layer w0.5: inv1.2 inv1.3 44.161,37.569 66.362,37.569 R2.1
chaveB: inv1.10 R8.1 | length 67.6
  Bottom Layer w0.5: inv1.10 49.052,45 59,45 67,53 86,53 88,51 88,32.327 R8.1
chaveB/: inv1.11 inv1.12 R6.1 | length 67.4
  Bottom Layer w0.5: inv1.12 inv1.11 44.76,43.24 47,41 59,41 70,52 85,52 87,50 87,35.618 R6.1
chaveC: inv2.4 R12.1 | length 78.4
  Bottom Layer w0.5: inv2.4 48.225,54 90,54 99.928,44.072 99.928,38.545 R12.1
chaveC/: inv2.2 inv2.3 R10.1 | length 82.2
  Bottom Layer w0.5: inv2.2 inv2.3 46.685,55 92.731,55 108.485,39.246 R10.1
chaveD: inv2.10 R16.1 | length 105.7
  Bottom Layer w0.5: inv2.10 49.145,60 57.732,60 59.732,58 119,58 127,50 127,32.603 R16.1
chaveD/: inv2.11 inv2.12 R14.1 | length 101.6
  Bottom Layer w0.5: inv2.12 inv2.11 46.552,56.294 80.86,56.294 81.566,57 117,57 124.385,49.615 R14.1
chaveE: inv4.4 R20.1 | length 142.8
  Bottom Layer w0.5: R20.1 147.981,29.615 143,34.597 143,51 152,60 240,60 242,62 253.474,62 inv4.4
chaveE/: inv4.2 inv4.3 R18.1 | length 141.8
  Bottom Layer w0.5: R18.1 145,37.784 145,51 153,59 244,59 246,57 259.006,57 inv4.2 inv4.3
chaveF: inv4.10 R24.1 | length 110.6
  Bottom Layer w0.5: R24.1 171.022,35.887 171.022,46.729 181.293,57 239,57 246,50 252.006,50 inv4.10
chaveF/: inv4.11 inv4.12 R22.1 | length 111.3
  Bottom Layer w0.5: R22.1 164.425,42.425 180,58 241.598,58 245.105,54.493 253.362,54.493 inv4.11 inv4.12
chaveG: inv3.4 R28.1 | length 105.9
  Bottom Layer w0.5: R28.1 180,33.284 180,49.707 186.293,56 234,56 244,46 253.184,46 inv3.4
chaveG/: inv3.2 inv3.3 R26.1 | length 101.7
  Bottom Layer w0.5: R26.1 181,37.472 181,49 183,51 235,51 245,41 256.244,41 inv3.3 inv3.2
chaveH: inv4.6 R32.1 | length 70.1
  Top Layer w0.5: R32.1 197.579,31.824 197.579,34.579 218,55 245.962,55 245.982,55.021 246.867,55.021 inv4.6
chaveH/: inv4.5 inv4.8 R30.1 | length 67.6
  Top Layer w0.5: R30.1 200.259,34.625 200.259,35.259 202,37 219,54 246.234,54 inv4.8 248.58,54.194 inv4.5
chaveI: inv3.6 R36.1 | length 61.7
  Top Layer w0.5: R36.1 218,34.662 218,51 219,52 220,53 241.104,53 inv3.6
chaveI/: inv3.5 inv3.8 R34.1 | length 62.8
  Top Layer w0.5: R34.1 220,37.85 220,51 221,52 235.727,52 248.324,39.403 248.324,38.16 ; inv3.8 248.324,38.16 ; inv3.5 248.324,38.16
chaveJ: inv3.10 R40.1 | length 26.8
  Top Layer w0.5: R40.1 237.051,31.73 237.051,35.071 239.001,37.02 240.924,37.02 244.944,33 251,33 253.404,35.404 inv3.10
chaveJ/: inv3.11 inv3.12 R38.1 | length 22.3
  Top Layer w0.5: R38.1 242.943,31.026 251.351,31.026 inv3.11 inv3.12
gnd: buffer1.1 buffer1.10 C1.1 C2.1 C3.2 C4.1 C5.2 C6.2 C7.2 C8.2 C9.2 C10.2 C11.2 C12.2 C13.2 C14.2 C15.2 C16.2 C17.1 C18.2 C19.1 C20.2 C21.2 divi1.2 divi1.8 divi1.14 H_gnd.C1 H_gnd.C2 H_gnd.C3 H_gnd.C4 H_gnd.C5 H_gnd.C6 H_gnd.C7 H_gnd.C8 inv1.7 inv2.7 inv3.7 inv4.7 lm1.12 lm2.12 lm3.12 lm4.12 nano1.29 pin_gnd1.1 pin_gnd2.1 pot1.1 pot2.3 pot3.1 pot4.1 pot5.1 pot6.3 R1.2 R5.2 R9.2 R13.2 R17.2 R21.2 R25.2 R29.2 R33.2 R37.2 R48.2 R50.2 R52.2 R54.2 R56.2 R58.2 R60.2 R62.2 R64.2 R66.2 U1.8 | length 17.8
  Bottom Layer w0.5: H_gnd.C7 H_gnd.C5 H_gnd.C3 H_gnd.C1 H_gnd.C2 H_gnd.C4 H_gnd.C6 H_gnd.C8
  other v2: 78.744,62.144 237.948,64.779 63.36,172.994 239.41,174.362 19.196,212.572
NetC7_1: C7.1 inv1.1 R1.1 R3.2 | length 32.6
  Bottom Layer w0.5: R3.2 24.734,23.234 R1.1 ; C7.1 24.633,40.308 24.633,34.464 R1.1 ; inv1.1 25.992,35.62 R1.1
NetC8_1: C8.1 inv1.13 R5.1 R7.2 | length 51.8
  Bottom Layer w0.5: R7.2 18,22.5 18,42 22.414,46.414 R5.1 ; C8.1 24.847,52.316 24.847,46.498 R5.1 ; inv1.13 36.499,46.414 R5.1
NetC9_1: C9.1 inv2.1 R9.1 R11.2 | length 57.6
  Bottom Layer w0.5: R11.2 15,33.25 R9.1 13.787,34.464 13.787,40.308 C9.1 17,43.724 17,54 19,56 31.607,56 inv2.1
NetC10_1: C10.1 inv2.13 R13.1 R15.2 | length 70.7
  Bottom Layer w0.5: R15.2 6.981,25.519 6.981,41.981 11.414,46.414 12.787,46.414 ; 13.65,47.246 13.761,47.136 13.761,46.739 R13.1 ; inv2.13 36.732,55.207 34.793,55.207 32.452,57.548 17.548,57.548 13.917,53.917 C10.1 14.001,52.316 14.001,46.498 R13.1 ; 12.787,46.414 13.229,46.856 13.643,46.856 R13.1 ; 12.787,46.414 R13.1
NetC11_1: C11.1 inv4.1 R17.1 R19.2 | length 81.8
  Bottom Layer w0.5: inv4.1 264,59.454 264,65 269,70 276.354,70 C11.1 279.341,66.987 279.341,61.012 R17.1 281.329,59 285,59 287,57 287,21.914 R19.2
NetC12_1: C12.1 inv4.13 R21.1 R23.2 | length 69
  Bottom Layer w0.5: inv4.13 261.28,51.872 R21.1 ; C12.1 270.421,66.987 270.421,61.012 R21.1 ; R23.2 279,18.918 279,32 277,34 277,57 275,59 272.409,59 R21.1
NetC13_1: C13.1 inv3.1 R25.1 R27.2 | length 49.7
  Bottom Layer w0.5: inv3.1 264.807,43.24 R25.1 ; C13.1 270.421,55.294 270.421,48.854 R25.1 ; R27.2 274,18.922 274,30 272.976,31.024 272.976,46.274 R25.1
NetC14_1: C14.1 inv4.9 R29.1 R31.2 | length 60.8
  Top Layer w0.5: inv4.9 253.774,49 267,49 269,51 277.178,51 R29.1 ; C14.1@279.362,55.29 279.349,55.278 279.349,48.838 279.337,48.825 281.928,46.234 R31.2
NetC15_1: C15.1 inv3.9 R33.1 R35.2 | length 51.8
  Top Layer w0.5: inv3.9 254.244,39 264,39 271,46 277,46 279.047,43.953 279.047,42.918 C15.1 279.349,42.591 279.349,36.151 R33.1 279.337,29.013 R35.2
NetC16_1: C16.1 inv3.13 R37.1 R39.2 | length 27.5
  Top Layer w0.5: inv3.13 262.644,34 268.533,34 270.409,32.124 ; C16.1 270.421,42.591 270.421,36.151 R37.1 270.409,32.124 ; R39.2 270.409,28.111 270.409,32.124
NetC17_2: C17.2 lm1.5 lm1.7 lm1.8 lm1.10 pot2.2 probe1.1 probe2.1 | length 69
  Bottom Layer w0.5: lm1.10 12.228,152.578 ; lm1.8 12.228,157.658 ; probe2.1@8.426,177.87 8.483,177.926 probe1.1 11.18,178.974 pot2.2 ; 12.228,152.122 lm1.5 ; 12.228,157.202 lm1.7 ; 12.228,171.978 C17.2
  Bottom Layer w1: 12.228,152.122 12.228,152.578 12.228,157.202 12.228,157.658 12.228,171.978 probe1.1
NetchavA1_1: chavA1.C2 R3.1 | length 15.1
  Bottom Layer w0.5: R3.1 30.128,9.372 chavA1.C2
NetchavB1_1: chavB1.C2 R7.1 | length 45.8
  Bottom Layer w0.5: R7.1 28.128,7.372 58.168,7.372 chavB1.C2
NetchavC1_1: chavC1.C2 R11.1 | length 76.1
  Bottom Layer w0.5: R11.1 15.325,16.175 25.673,5.827 81.623,5.827 chavC1.C2
NetchavD1_1: chavD1.C2 R15.1 | length 106.2
  Bottom Layer w0.5: R15.1 23.016,4.484 105.28,4.484 chavD1.C2
NetchavE1_1: chavE1.C2 R19.1 | length 152.5
  Bottom Layer w0.5: chavE1.C2 140.616,3.924 274.01,3.924 274.46,4.374 R19.1
NetchavF1_1: chavF1.C2 R23.1 | length 121.4
  Bottom Layer w0.5: chavF1.C2 164.214,5.326 270.408,5.326 R23.1
NetchavG1_1: chavG1.C2 R27.1 | length 90.2
  Bottom Layer w0.5: chavG1.C2 187.738,6.802 266.88,6.802 R27.1
NetchavH1_1: chavH1.C2 R31.1 | length 85.2
  Top Layer w0.5: chavH1.C2 214.908,4.632 272.632,4.632 274,6 280,12 280,19.672 R31.1
NetchavI1_1: chavI1.C2 R35.1 | length 53.6
  Top Layer w0.5: chavI1.C2 237.168,7.372 271.372,7.372 273,9 275,11 275,19.676 R35.1
NetchavJ1_1: chavJ1.C2 R39.1 | length 21.3
  Top Layer w0.5: chavJ1.C2 267.372,9.372 269,11 270,12 270,19.681 R39.1
Netdivi1_9: divi1.9 divi1.15 | length 16.9
  Bottom Layer w0.4: divi1.9 36.076,139.448 36.076,150.663 divi1.15
NetH_LED1_1: H_LED1.C1 H_LED1.C2 lm2.6 R48.1 | length 62.7
  Bottom Layer w0.5: H_LED1.C1 H_LED1.C2 70.939,192.331 R48.1 69,185.57 69,181.01 70.416,179.594 103.594,179.594 lm2.6
NetH_LED2_1: H_LED2.C1 H_LED2.C2 lm2.4 R50.1 | length 44.6
  Top Layer w0.5: R50.1 79.448,184 99,184 100.92,182.08 lm2.4
  Bottom Layer w0.5: R50.1 75.939,191.169 H_LED2.C2 H_LED2.C1
NetH_LED3_1: H_LED3.C1 H_LED3.C2 lm2.8 R52.1 | length 41.3
  Top Layer w0.5: R52.1 85.184,191.754 106.406,191.754 ; H_LED3.C2 103.27,194.89 106.406,191.754 ; lm2.8 106.406,191.754
  Bottom Layer w0.5: H_LED3.C2 H_LED3.C1
NetH_LED4_1: H_LED4.C1 H_LED4.C2 lm2.10 R54.1 | length 45.3
  Top Layer w0.5: R54.1 89.43,191 102.08,191 lm2.10
  Bottom Layer w0.5: lm2.10 112.8,198.96 H_LED4.C2 H_LED4.C1
NetH_LED5_1: H_LED5.C1 H_LED5.C2 lm3.6 R56.1 | length 75.9
  Bottom Layer w0.5: H_LED5.C2 H_LED5.C1 128.884,188.154 128.884,187.682 R56.1 126,184.798 126,181 127.727,179.273 167.273,179.273 170,182 lm3.6
NetH_LED6_1: H_LED6.C1 H_LED6.C2 lm3.4 R58.1 | length 70.5
  Top Layer w0.5: R58.1 136.916,184 163.19,184 lm3.4
  Bottom Layer w0.5: R58.1 139.202,193 151,193 159.5,201.5 H_LED6.C1 H_LED6.C2
NetH_LED7_1: H_LED7.C1 H_LED7.C2 lm3.8 R60.1 | length 54.1
  Top Layer w0.5: R60.1 145,193.798 168.632,193.798 lm3.8 ; H_LED7.C2@180.983,198.713 H_LED7.C2
  Bottom Layer w0.5: lm3.8 180.983,197.793 H_LED7.C2@180.983,198.713 ; H_LED7.C2 H_LED7.C1
NetH_LED8_1: H_LED8.C1 H_LED8.C2 lm3.10 R62.1 | length 68.3
  Top Layer w0.5: R62.1 143.884,187.682 148.202,192 165.35,192 lm3.10
  Bottom Layer w0.5: lm3.10 169.788,187.562 189.332,187.562 H_LED8.C2 H_LED8.C1
NetH_LED9_1: H_LED9.C1 H_LED9.C2 lm4.8 R64.1 | length 62.4
  Bottom Layer w0.5: H_LED9.C2 H_LED9.C1 216.365,201.54 216.365,200.773 R64.1 204.306,186 233.46,186 lm4.8
NetH_LED10_1: H_LED10.C1 H_LED10.C2 lm4.10 R66.1 | length 40.1
  Bottom Layer w0.5: R66.1 208.783,188.192 230.572,188.192 lm4.10 232,191.23 H_LED10.C2 H_LED10.C1
NetHAB1_1: HAB1.C1 HAB1.C2 R4.2 | length 19
  Bottom Layer w0.5: R4.2 73.093,31.547 73.093,35.314 75,37.221 HAB1.C1 HAB1.C2
NetHAB1_3: HAB1.C3 HAB1.C4 R2.2 | length 14.5
  Bottom Layer w0.5: R2.2 77.54,37.167 HAB1.C3 HAB1.C4
NetHAB1_5: HAB1.C5 HAB1.C6 R8.2 | length 18.7
  Bottom Layer w0.5: HAB1.C6 HAB1.C5 80.08,38.08 79,37 79,31.649 R8.2
NetHAB1_7: HAB1.C7 HAB1.C8 R6.2 | length 14.1
  Bottom Layer w0.5: R6.2 82.62,36.238 HAB1.C7 HAB1.C8
NetHCD1_1: HCD1.C1 HCD1.C2 R12.2 | length 19
  Bottom Layer w0.5: HCD1.C2 HCD1.C1 112,44.594 111,43.594 111,32.473 R12.2
NetHCD1_3: HCD1.C3 HCD1.C4 R10.2 | length 13.7
  Bottom Layer w0.5: R10.2 114.54,35.334 HCD1.C3 HCD1.C4
NetHCD1_5: HCD1.C5 HCD1.C6 R16.2 | length 18.5
  Bottom Layer w0.5: HCD1.C6 HCD1.C5 117.08,32.293 R16.2
NetHCD1_7: HCD1.C7 HCD1.C8 R14.2 | length 13.4
  Bottom Layer w0.5: R14.2 119.385,34.455 119.62,34.69 HCD1.C7 HCD1.C8
NetHclk2_7: Hclk2.C7 Hclk2.C8 | length 2.5
  Bottom Layer w0.5: Hclk2.C7 Hclk2.C8
NetHEF1_1: HEF1.C1 HEF1.C2 R20.2 | length 20
  Bottom Layer w0.5: HEF1.C2 HEF1.C1 149,42 151,40 151,31.597 R20.2
NetHEF1_3: HEF1.C3 HEF1.C4 R18.2 | length 13.8
  Bottom Layer w0.5: HEF1.C4 HEF1.C3 151.54,42.46 153.306,40.694 R18.2
NetHEF1_5: HEF1.C5 HEF1.C6 R24.2 | length 20.5
  Bottom Layer w0.5: HEF1.C6 HEF1.C5 157,42.08 157,31.716 R24.2
NetHEF1_7: HEF1.C7 HEF1.C8 R22.2 | length 14.2
  Bottom Layer w0.5: HEF1.C8 HEF1.C7 159.425,42.195 R22.2
NetHGH1_1: HGH1.C1 HGH1.C2 R28.2 | length 19.5
  Bottom Layer w0.5: HGH1.C2 HGH1.C1 186,32.284 R28.2
NetHGH1_3: HGH1.C3 HGH1.C4 R26.2 | length 13.6
  Bottom Layer w0.5: HGH1.C4 HGH1.C3 ; HGH1.C3@188.75,44.79 HGH1.C3 ; R26.2@189,34.484 R26.2 188.994,34.654 188.682,34.967 188.682,44.858 HGH1.C3
NetHGH1_5: HGH1.C5 HGH1.C6 R32.2 | length 19.9
  Top Layer w0.5: HGH1.C6 HGH1.C5 191.08,35.92 195.113,31.887 R32.2
NetHGH1_7: HGH1.C7 HGH1.C8 R30.2 | length 13.7
  Top Layer w0.5: HGH1.C8 HGH1.C7 193.62,35.971 R30.2
NetHIJ1_1: HIJ1.C1 HIJ1.C2 R36.2 | length 20.1
  Top Layer w0.5: HIJ1.C2 HIJ1.C1 224,36.698 228.372,32.327 R36.2
NetHIJ1_3: HIJ1.C3 HIJ1.C4 R34.2 | length 13.8
  Top Layer w0.5: HIJ1.C4 HIJ1.C3 226.54,36.31 R34.2
NetHIJ1_5: HIJ1.C5 HIJ1.C6 R40.2 | length 20.5
  Top Layer w0.5: HIJ1.C6 HIJ1.C5 229.08,37.129 234.491,31.718 R40.2
NetHIJ1_7: HIJ1.C7 HIJ1.C8 R38.2 | length 14.3
  Top Layer w0.5: HIJ1.C8 HIJ1.C7 231.62,37.349 R38.2
NetLED1_1: LED1.1 R49.1 | length 25.6
  Bottom Layer w0.5: R49.1 56.206,192.206 57,193 57,206 60,209 LED1.1
NetLED1_2: LED1.2 lm2.1 | length 51.6
  Bottom Layer w0.5: LED1.2 73,201.54 73,182 74.467,180.533 91.833,180.533 lm2.1
NetLED2_1: LED2.1 R51.1 | length 43.8
  Bottom Layer w0.5: R51.1 56,201.346 56,210 59,213 78.5,213 LED2.1
NetLED2_2: LED2.2 lm2.2 | length 31.5
  Bottom Layer w0.5: LED2.2 90.421,203.619 90.421,188.251 95.66,183.012 95.66,182.18 lm2.2
NetLED3_1: LED3.1 R53.1 | length 60.2
  Bottom Layer w0.5: R53.1 55,205.424 55,211 58,214 97,214 LED3.1
NetLED3_2: LED3.2 lm2.14 | length 24
  Bottom Layer w0.5: lm2.14 93.3,197.3 104.368,208.368 104.368,208.828 LED3.2
NetLED4_1: LED4.1 R55.1 | length 76.6
  Bottom Layer w0.5: R55.1 51.938,209.938 57,215 115.5,215 LED4.1
NetLED4_2: LED4.2 lm2.13 | length 36.2
  Bottom Layer w0.5: lm2.13 99.22,193 104,193 116,205 120.04,205 LED4.2
NetLED5_1: LED5.1 R57.1 | length 93.4
  Bottom Layer w0.5: R57.1 55.388,215.968 134.032,215.968 LED5.1
NetLED5_2: LED5.2 lm3.1 | length 66.1
  Bottom Layer w0.5: LED5.2 146,206.54 146,196 145,195 138,195 131,188 131,182.293 132.914,180.379 155.949,180.379 lm3.1
NetLED6_1: LED6.1 R59.1 | length 97.4
  Bottom Layer w0.5: LED6.1 167.5,216 246.974,216 251.047,211.927 R59.1
NetLED6_2: LED6.2 lm3.2 | length 36.8
  Bottom Layer w0.5: lm3.2 160,182.11 160,183 155,188 155,191 158.638,194.638 163.338,194.638 165,196.3 165,207.04 LED6.2
NetLED7_1: LED7.1 R61.1 | length 79.2
  Bottom Layer w0.5: LED7.1 186,215 245.196,215 R61.1
NetLED7_2: LED7.2 lm3.14 | length 33
  Bottom Layer w0.5: lm3.14 160.95,193 166.54,193 LED7.2
NetLED8_1: LED8.1 R63.1 | length 62.7
  Bottom Layer w0.5: LED8.1 204.5,214 244,214 248,210 248,207.118 R63.1
NetLED8_2: LED8.2 lm3.13 | length 66.5
  Bottom Layer w0.5: lm3.13 163.733,185.997 191.482,185.997 197.228,191.743 202.34,191.743 206,195.403 206,205.04 LED8.2
NetLED9_1: LED9.1 R65.1 | length 46.2
  Bottom Layer w0.5: LED9.1 223,213 243,213 247,209 247,203.04 R65.1
NetLED9_2: LED9.2 lm4.14 | length 21.3
  Bottom Layer w0.5: LED9.2 224,206.54 224,191.78 lm4.14
NetLED10_1: LED10.1 R67.1 | length 30.4
  Bottom Layer w0.5: LED10.1 238.5,210.5 239.76,211.76 242.24,211.76 246,208 246,198.801 R67.1
NetLED10_2: LED10.2 lm4.13 | length 26.3
  Bottom Layer w0.5: lm4.13 232.729,197.969 232.729,200.689 LED10.2
Netlm1_4: lm1.4 pot4.2 | length 57.3
  Bottom Layer w0.5: lm1.4 20.99,151.18 20.99,165.99 20.99,166.99 32,178 32,188.223 31,189.223 pot4.2
Netlm1_6: lm1.6 pot1.2 | length 40
  Bottom Layer w0.5: lm1.6 18.594,153.864 18.594,168.133 26.085,175.624 pot1.2
Netlm1_9: lm1.9 pot3.2 | length 46.5
  Bottom Layer w0.5: lm1.9 5.48,153.79 5.48,188.438 pot3.2
Netlm1_11: lm1.11 pot5.2 | length 60.1
  Bottom Layer w0.5: lm1.11 4,150.19 4,194.253 pot5.2
Netlm2_5: lm2.5 lm2.7 lm2.9 lm2.11 lm3.5 lm3.7 lm3.9 lm3.11 lm4.9 lm4.11 pot6.2 | length 291.1
  Top Layer w0.5: pot6.2 44.898,182.102 50,177 98.46,177 ; lm2.11 103.46,187.08 lm2.5 98.46,177 ; lm2.9 108.54,187.08 lm2.7 103.54,177 ; lm3.11 167.73,187.08 lm3.5 162.73,177 ; lm3.9 172.81,187.08 lm3.7 167.81,177 ; lm4.11 235.08,184 238,184 ; lm4.9 234.54,187.46 238,184 ; 98.46,177 103.54,177 ; 103.54,177 162.73,177 ; 162.73,177 167.81,177 ; 167.81,177 238,177 240,179 240,182 238,184
NetR41_2: R41.2 U1.7 | length 39
  Bottom Layer w0.5: U1.7 280.147,205.013 280.147,175.912 R41.2
NetR42_2: R42.2 U1.6 | length 38.4
  Bottom Layer w0.5: U1.6 283.608,204.092 R42.2
NetR43_2: R43.2 U1.4 | length 22.3
  Bottom Layer w0.5: R43.2 275.54,177.138 U1.4
NetR44_2: R44.2 U1.2 | length 22.6
  Bottom Layer w0.5: R44.2 270.46,177.891 U1.2
NetR45_2: R45.2 U1.1 | length 24
  Bottom Layer w0.5: R45.2 267.92,181.184 U1.1
NetR46_2: R46.2 U1.9 | length 42.7
  Bottom Layer w0.5: R46.2 265.127,184.225 265.127,195.546 270.46,200.879 U1.9
NetR47_2: R47.2 U1.10 | length 44.1
  Bottom Layer w0.5: R47.2 262.97,187.901 262.97,196.345 267.92,201.295 U1.10
pin_F: lm1.1 lm1.14 nano1.16 | length 33.4
  Bottom Layer w0.5: nano1.16 8.19,117.625 lm1.14 lm1.1
pin_Freq: divi1.7 nano1.22 | length 47.2
  Bottom Layer w0.5: nano1.22 15,102.045 15,106.699 21,112.699 21,134.532 divi1.7
pin_High: divi1.4 lm1.2 nano1.19 | length 51.8
  Bottom Layer w0.5: nano1.19 18.536,113.201 18.536,138.194 lm1.2 19.768,140.92 divi1.4
pin_Low: lm1.13 nano1.20 | length 40.1
  Bottom Layer w0.5: lm1.13 6.233,138.963 6.233,109.423 nano1.20
segA: nano1.24 R41.1 | length 337.9
  Bottom Layer w0.5: nano1.24 13.545,91.951 13.545,67.041 18.613,61.973 68.973,61.973 167.034,160.034 269.27,160.034 R41.1
segBC: nano1.23 R42.1 R43.1 | length 345.7
  Bottom Layer w0.5: nano1.23 15.631,92.405 15.631,67.377 19.567,63.441 67.157,63.441 165.628,161.912 265.315,161.912 R43.1 274.416,171.014 281.133,171.014 R42.1
segD: nano1.15 R44.1 | length 342.2
  Top Layer w0.5: v1(21.306,65.316) 17.229,69.393 17.229,104.274 nano1.15
  Bottom Layer w0.5: v1(21.306,65.316) 21.497,65.125 22.075,65.125 22.1,65.1 65.296,65.1 163.602,163.406 260.975,163.406 R44.1
segE: nano1.14 R45.1 | length 327.9
  Top Layer w0.5: v1(24.316,67.152) 19.069,72.399 19.069,103.574 nano1.14
  Bottom Layer w0.5: v1(24.316,67.152) 24.468,67 64,67 162,165 256.736,165 R45.1
segF: nano1.13 R46.1 | length 314.4
  Top Layer w0.5: v1(24.677,70.014) 24.677,70.268 21.367,73.578 21.367,103.332 nano1.13
  Bottom Layer w0.5: v1(24.677,70.014) 26.116,68.576 61.576,68.576 159.598,166.598 252.5,166.598 R46.1
segG: nano1.5 R47.1 | length 282.2
  Bottom Layer w0.5: nano1.5 22.567,84.212 22.567,78.381 30.712,70.236 59.048,70.236 157.351,168.538 R47.1
pads on no net: buffer1.3 buffer1.17 chavA1.C1 chavB1.C1 chavC1.C1 chavD1.C1 chavE1.C1 chavF1.C1 chavG1.C1 chavH1.C1 chavI1.C1 chavJ1.C1 divi1.1 divi1.3 divi1.5 divi1.6 divi1.10 divi1.11 inv1.5 inv1.6 inv1.8 inv1.9 inv2.5 inv2.6 inv2.8 inv2.9 lm4.1 lm4.2 lm4.4 lm4.5 lm4.6 lm4.7 nano1.1 nano1.2 nano1.3 nano1.4 nano1.17 nano1.18 nano1.21 nano1.25 nano1.26 nano1.28 nano1.30 U1.3 U1.5

## Polygon pours and split planes (outlines as drawn)
gnd on Bottom Layer "solid" (solid, pour order 5): 0,0 295,0 295,220 0,220
no net on Bottom Layer "NONET_L02_P000" (solid, pour order 0): 14.086,46.414 14.001,46.498 14.086,46.414
gnd on Top Layer "solid2" (solid, pour order 6): 0,0 295,0 295,220 0,220

## Other copper
Bottom Layer:
  region net NetC10_1: 14.086,46.414 14.001,46.498 14.001,49.368 11.054,46.407
  region net 5V: 255.15,146.821 257.985,149.656 257.985,150.004 254.877,153.111
  region net 5V: 284.721,149.945 293.99,140.676 293.99,157.564
  region net 5V: 254.958,154.361 247.409,154.361 247.409,141.653 254.768,141.653 254.85,141.735
  region net -12V: 255.135,90.539 255.135,87.963 258.321,84.777 255.56,82.016 254.99,82.016
  region net 12V: 255.082,109.904 257.978,107.008 255.131,104.161
  region net -12V: 255.135,90.539 247.532,90.539 247.449,90.622 247.201,90.374 247.201,77.812 254.942,77.812 255.107,77.647
  region net 12V: 255.177,110.147 255.149,110.119 247.402,110.119 247.402,97.378 247.43,97.349 247.458,97.378 255.092,97.378
  region net NetC8_1: 24.954,49.186 24.954,49.084 27.6,46.438 25.054,46.438
  region net NetC8_1: 22.083,46.414 24.831,49.162 24.831,46.514 24.931,46.414

## Silkscreen, mask and mechanical layers (free items; w line width, h text height)
Top Overlay:
  drawing of 52 lines, arcs and shapes, not listed
  text "G.S" at 31.452,200.536 h4 r24.03
  text "A.D" at 35.244,198.844 h4 r24.03
  text "LEDS DE MONITORAÇÃO" at 60.312,191.513 h3
  text "FREQUÊNCIAS" at 41.789,164.03 h2.8
  text "Htz" at 41.907,160.671 h1
  text "100K" at 41.953,157.027 h1
  text "10K" at 41.953,154.481 h1
  text "1K" at 41.953,151.936 h1
  text "100" at 41.953,149.39 h1